# Altium PCB PCB2.PcbDoc
Units mil, origin at the board's own origin, x right, y up, seen from the top; angles counter-clockwise.
Board outline 1259.84 x 1615 mil, 2 copper layers (Top Layer, Bottom Layer); 51 components, 43 nets, 192 pads, 65 vias.
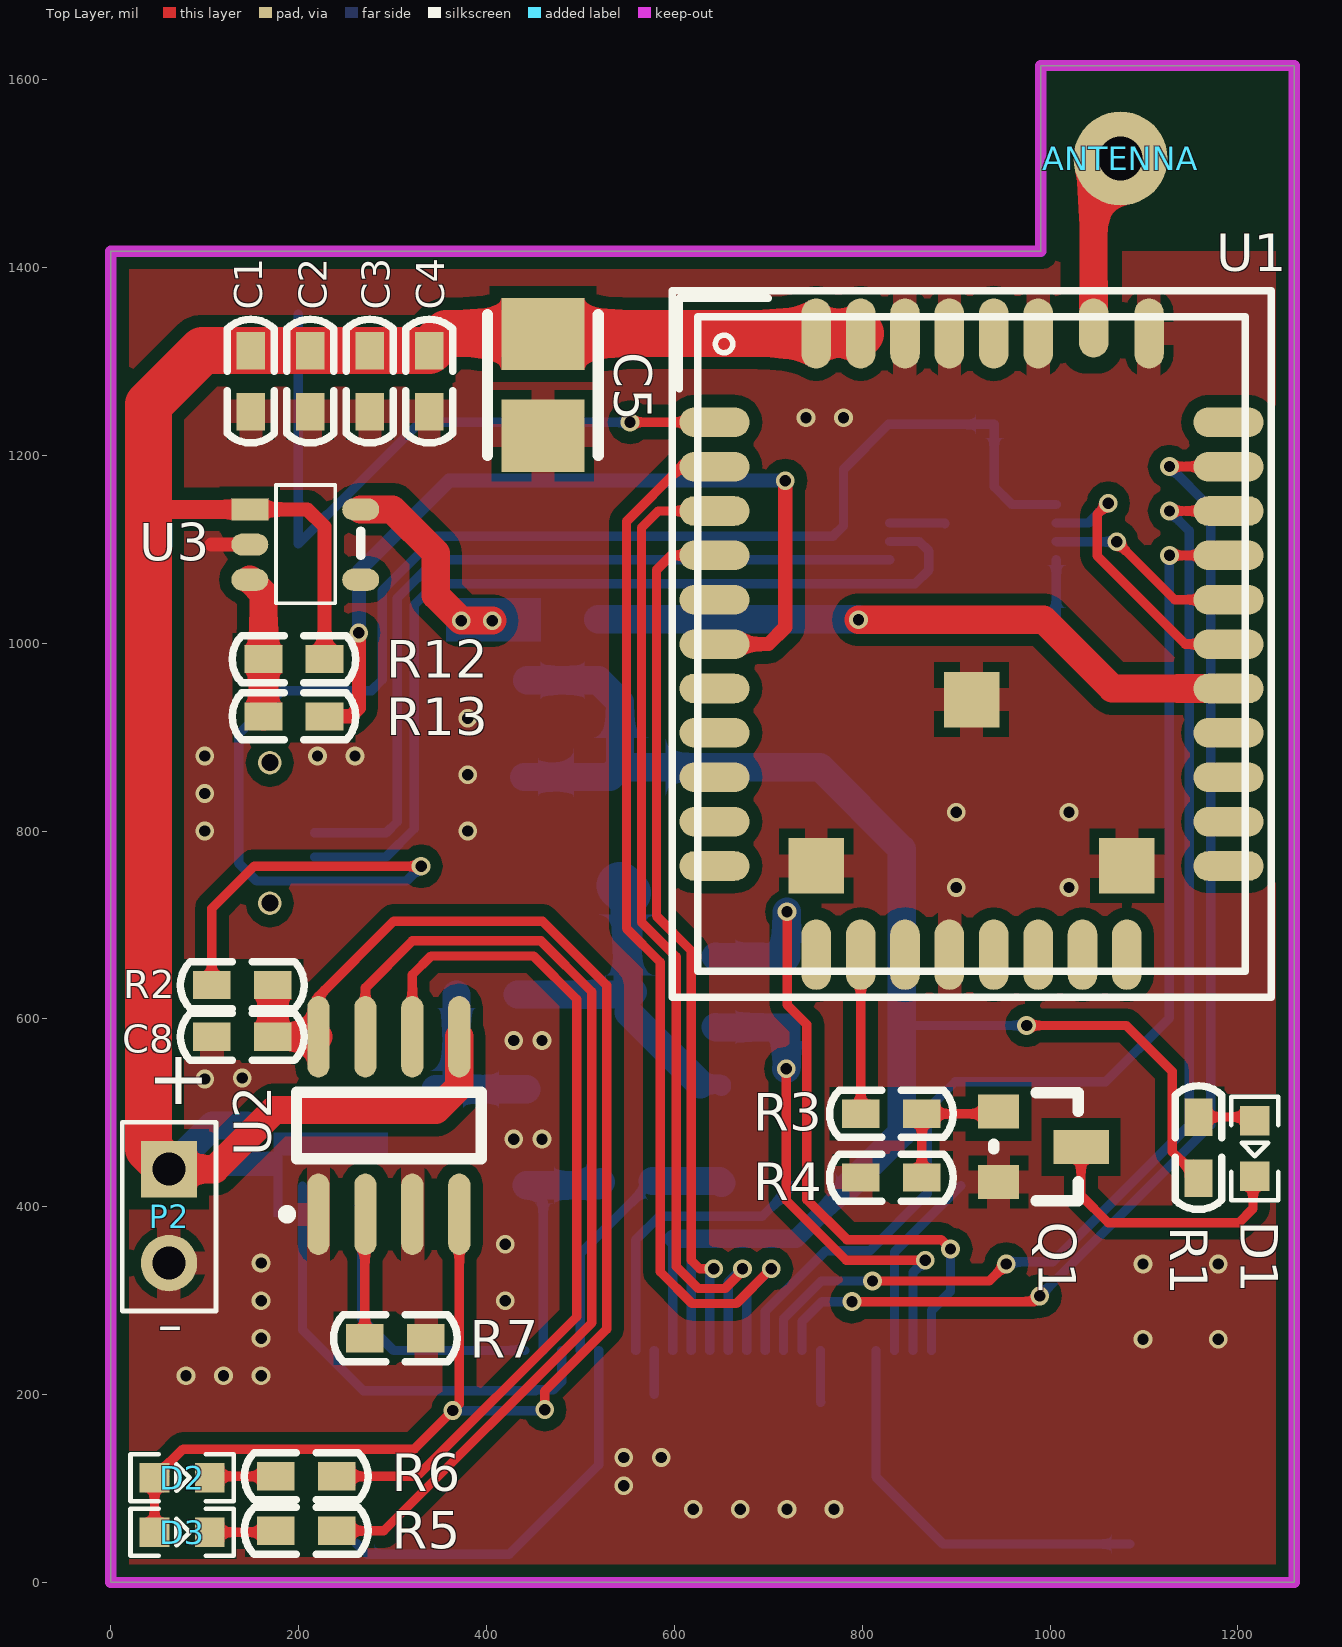
[diagram p0: Top Layer view]
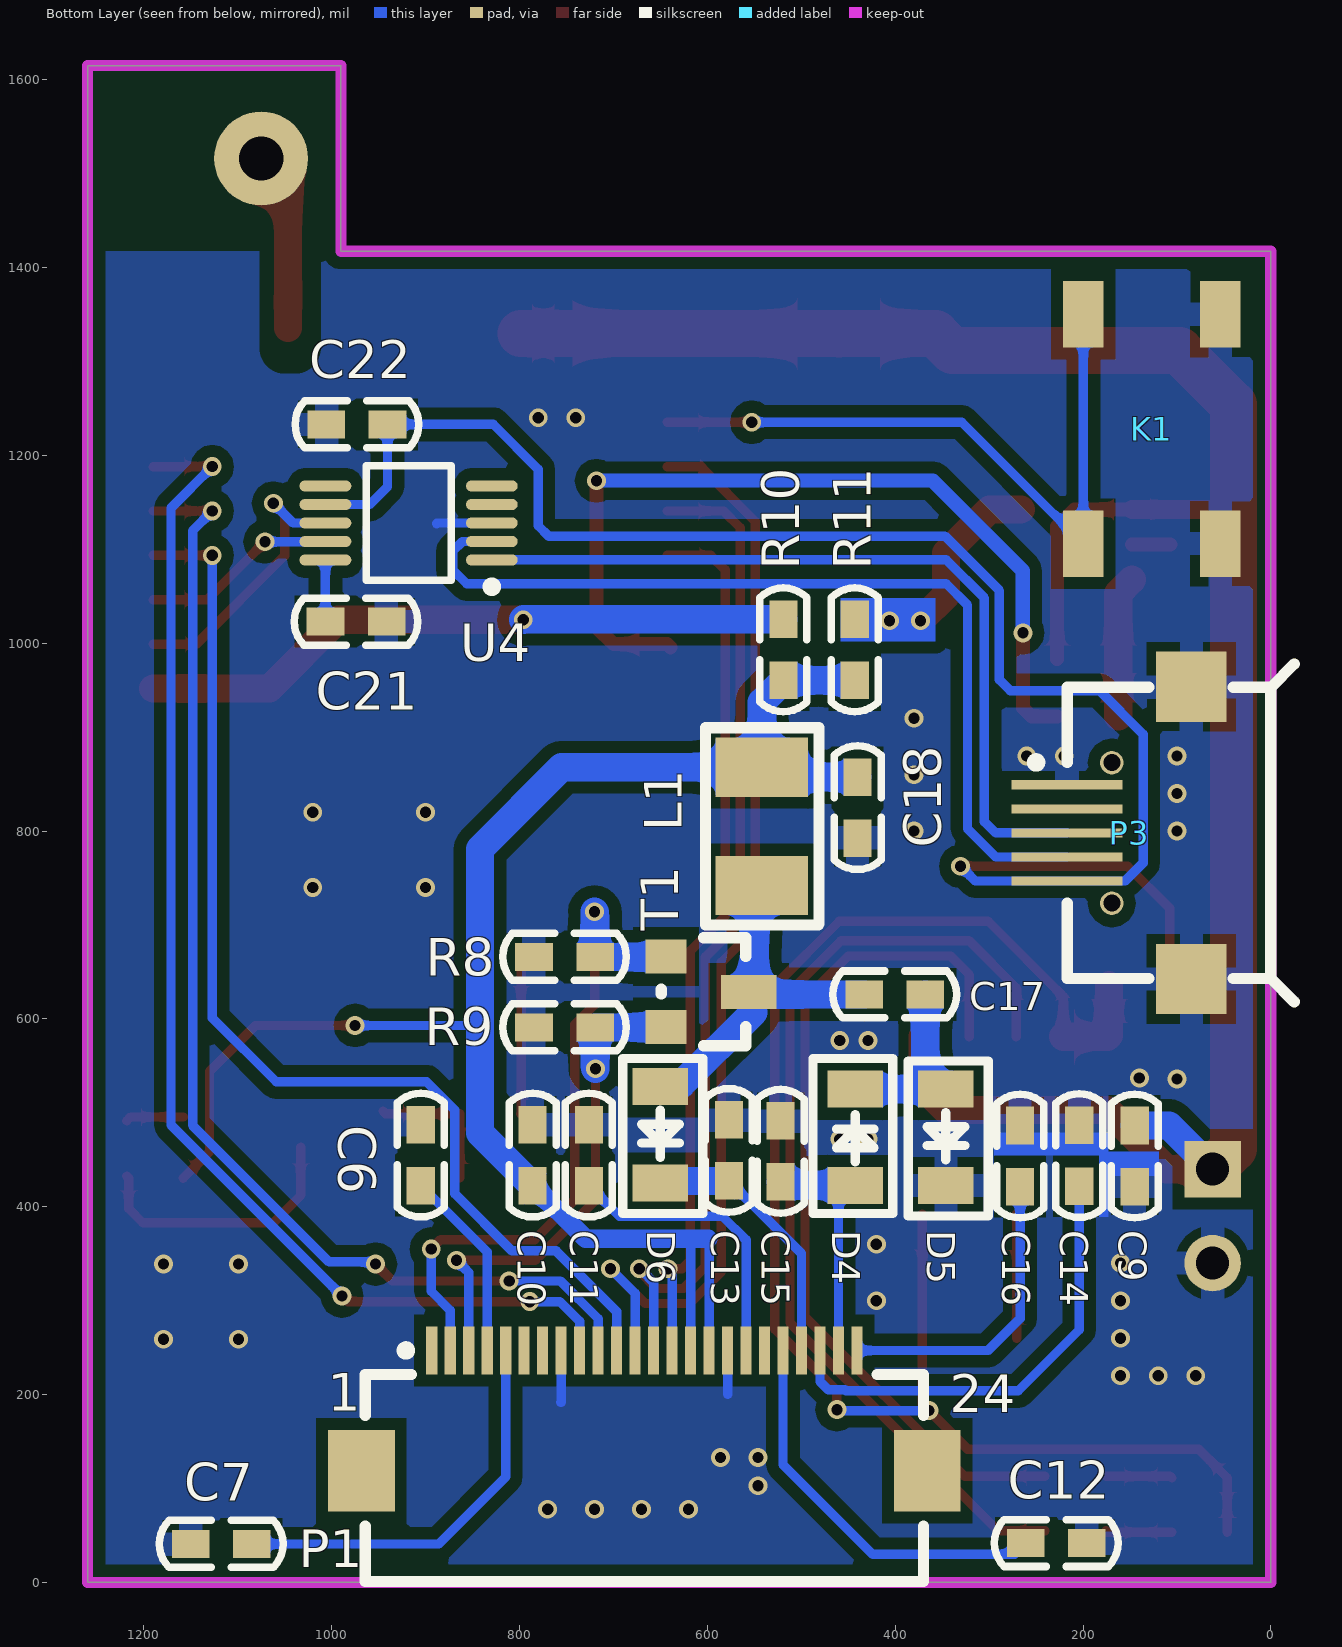
[diagram p1: Bottom Layer view, seen from below]
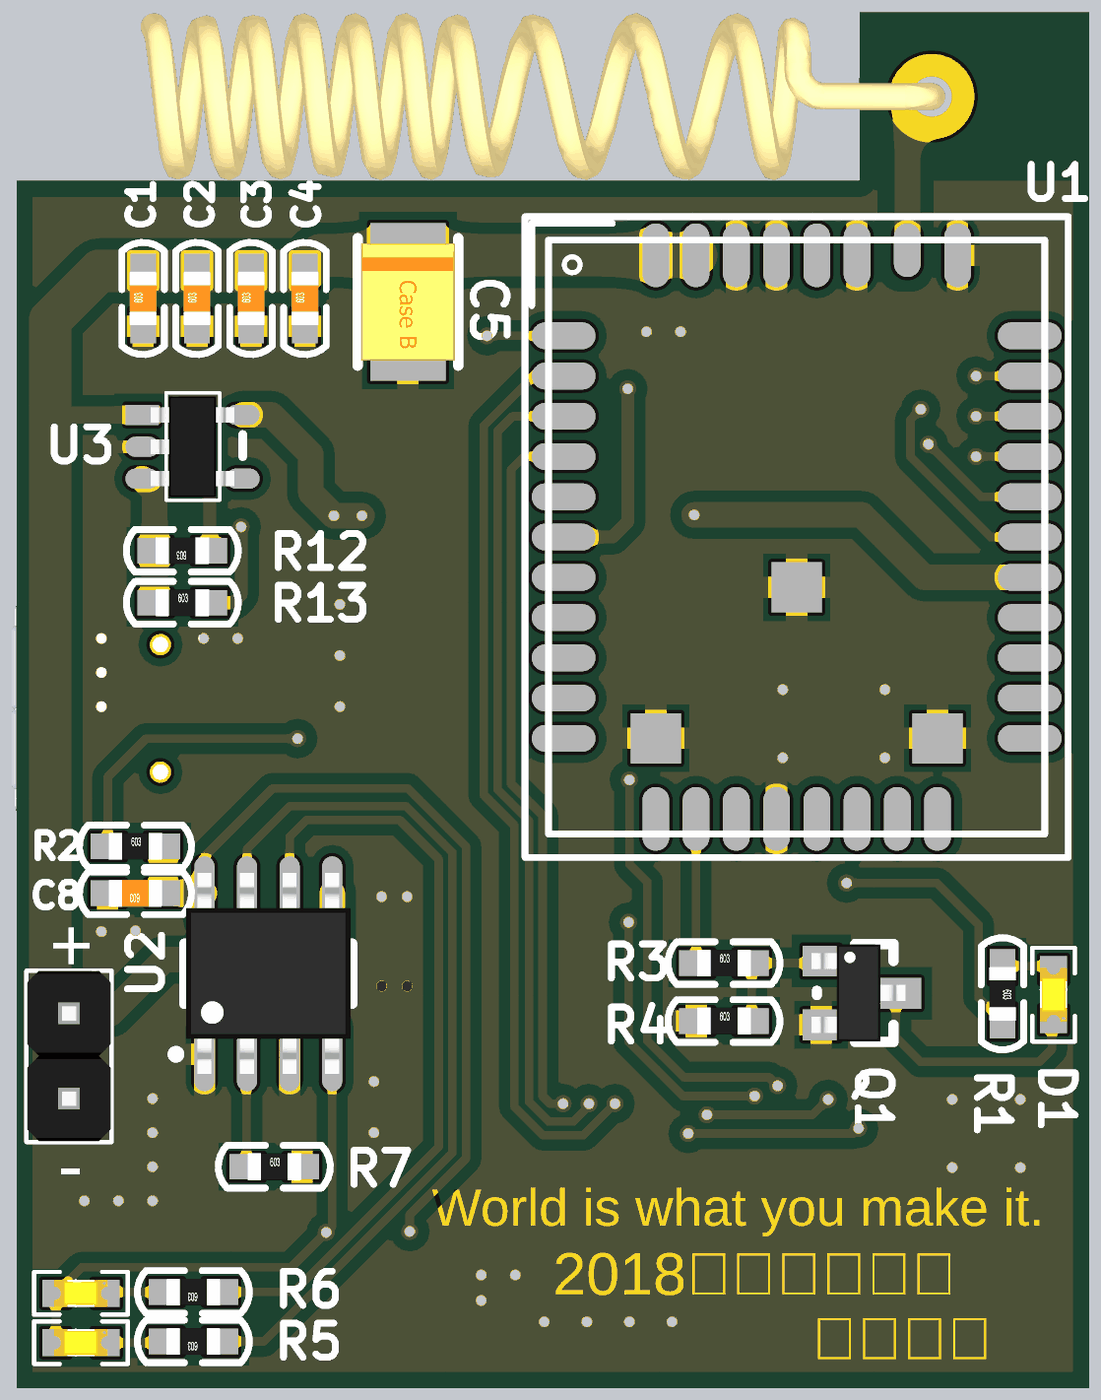
[diagram p2: 3D render of the assembled board from above, using the file's embedded part models]
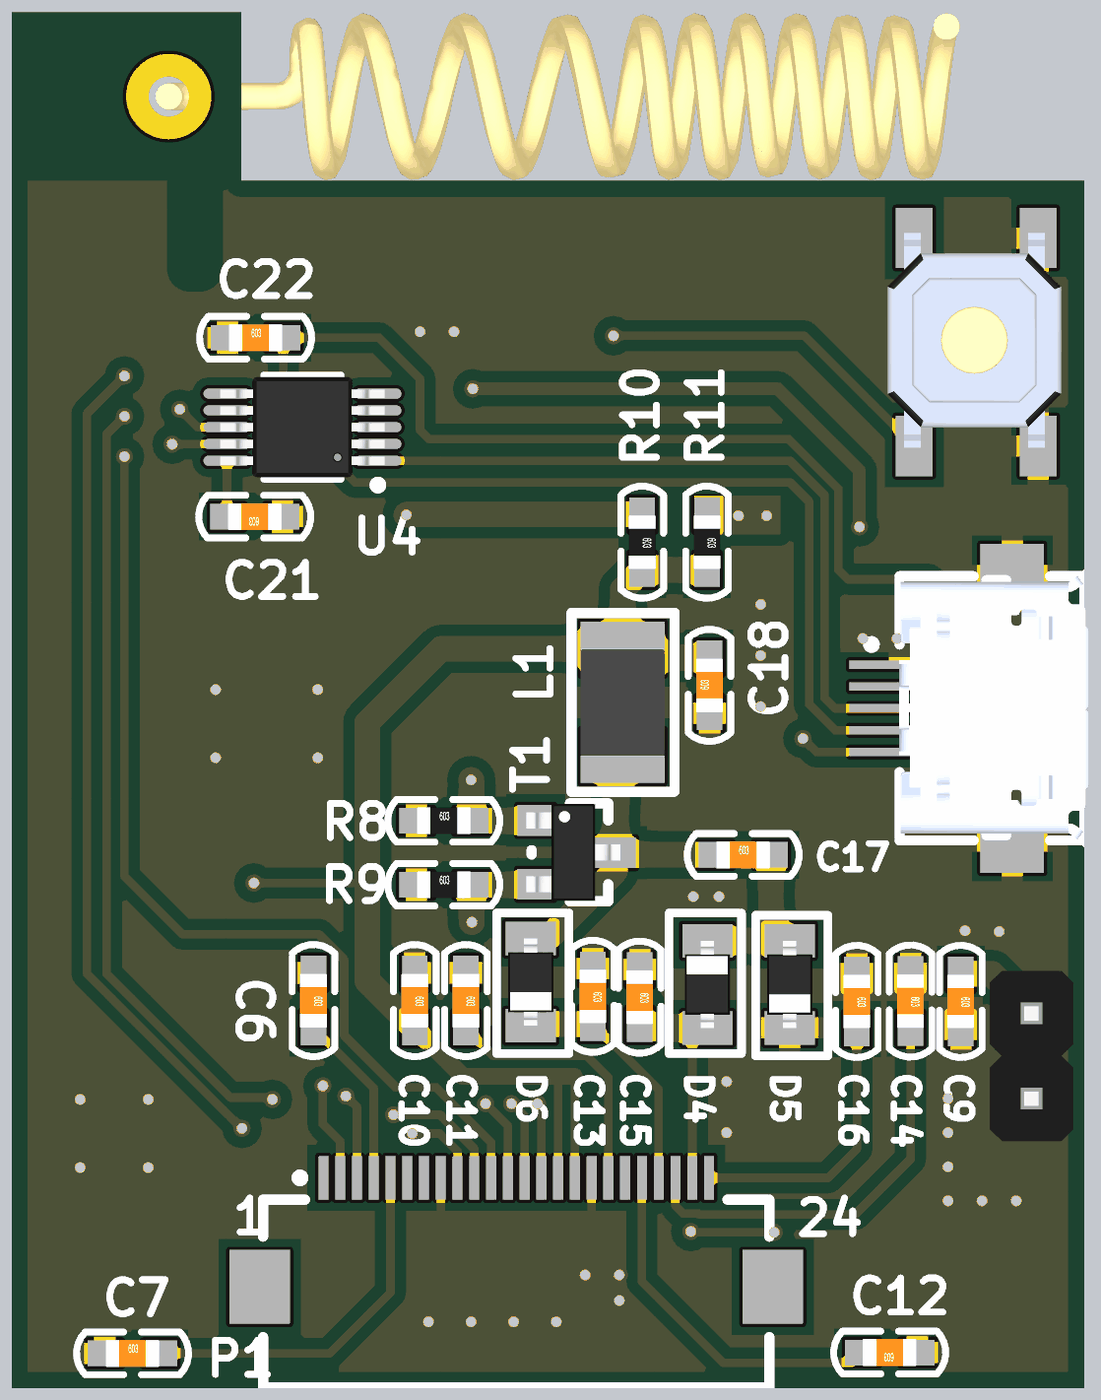
[diagram p3: 3D render of the assembled board from below, using the file's embedded part models]

## Layer stack, top to bottom
Top Solder: solder mask 0.4, Solder Resist, Dk 3.5
Top Layer: signal copper 1.4
Dielectric 1: dielectric 12.6, FR-4, Dk 4.8
Bottom Layer: signal copper 1.4
Bottom Solder: solder mask 0.4, Solder Resist, Dk 3.5

## Board outline
0,0 0,1417.32 990,1417.32 990,1615 1259.84,1615 1259.84,0

## Design rules (kind name [scope] priority, off if disabled: settings)
Clearance Clearance_1 [IsRegion] p1: gap=13
Clearance [All] p2: gap=6
MinimumSolderMaskSliver [All] p1: minsoldermaskwidth=0
PolygonConnect PolygonConnect_1 [IsVia] p1: connectstyle=Direct reliefconductorwidth=10 reliefentries=4 polygonreliefangle="90 Angle" airgapwidth=10
PolygonConnect [All] p2: connectstyle=Relief reliefconductorwidth=25 reliefentries=4 polygonreliefangle="90 Angle" airgapwidth=10
RoutingVias [All] p1: holewidth=28 width=50 viastyle="Through Hole" minholewidth=28 minwidth=50 maxholewidth=28 maxwidth=50
SilkToSilkClearance [All] p1: silktosilkclearance=0
SilkToSolderMaskClearance [IsPad] p1: minsilkscreentomaskgap=0 clearancetoexposedcopper=TRUE
SolderMaskExpansion [All] p1: expansion=4
Width [All] p1: maxlimit=50 minlimit=10 preferedwidth=30 minimp=50.000000 maximp=50.000000 favimp=50.000000
27 further rules are at their usual default settings.

## Components (designator, comment, footprint, x,y, rotation, side; value= is the part's Value field where it differs from the comment)
ANTENNA "ANTENNA" GSM/GPRS/3G弹簧天线 1075,1516 r180 top
C1 "18pF" 0603C-Cap 149,1279 r90 top
C2 "33pF" 0603C-Cap 212.33,1279 r90 top
C3 "0.1uF" 0603C-Cap 275.67,1279 r90 top
C4 "22uF" 0603C-Cap 339,1279 r90 top
C5 "Cap_C" CAPM-B-3528X21N 460,1275 r270 top
C6 "1uF" 0603C-Cap 905,455 r270 bottom
C7 "1uF" 0603C-Cap 1117.5,41 r180 bottom
C8 "10uF" 0603C-Cap 140,581 r180 top
C9 "10uF" 0603C-Cap 145,454 r270 bottom
C10 "0.1uF" 0603C-Cap 786,455 r270 bottom
C11 "1uF" 0603C-Cap 726,455 r270 bottom
C12 "1uF" 0603C-Cap 228.5,42 r0 bottom
C13 "1uF" 0603C-Cap 577,460 r270 bottom
C14 "1uF" 0603C-Cap 204,454.5 r270 bottom
C15 "1uF" 0603C-Cap 522,459 r270 bottom
C16 "1uF" 0603C-Cap 267,454 r270 bottom
C17 "4.7uF" 0603C-Cap 400.5,626 r180 bottom
C18 "4.7uF" 0603C-Cap 440,825 r90 bottom
C21 "0.1uF" 0603C-Cap 974,1023 r0 bottom
C22 "0.1uF" 0603C-Cap 973,1233 r180 bottom
D1 "LED" LED0603_B 1218,462 r270 top
D2 "LED" LED0603_B 76,111.5 r0 top
D3 "LED" LED0603_B 76,53.5 r0 top
D4 "Si1304BDL" SOD323 442.5,474 r90 bottom
D5 "Si1304BDL" SOD323 346,474 r270 bottom
D6 "Si1304BDL" SOD323 650,476.64 r270 bottom
K1 "SW_PB2" KEY_4*4 54,1350 r270 bottom
L1 "10uH" "3225 - duplicate" 542,805 r270 bottom
P1 "Header 24" FH12-24S-0.5SH 667,183 r180 bottom
P2 "Header 2" 2PIN 62,390 r270 top
P3 "USB-MINI" "Micro USB" 0,798 r90 bottom
Q1 "8050" SOT-23 989,464 r270 top
R1 "1K" 0603C-Res 1158,463 r270 top
R2 "0.4R" 0603C-Res 140,636 r0 top
R3 "1K" 0603C-Res 831,499 r0 top
R4 "10K" 0603C-Res 831,431 r0 top
R5 "1K" 0603C-Res 208,55 r180 top
R6 "1K" 0603C-Res 208,113 r180 top
R7 "1K" 0603C-Res 303,260 r0 top
R8 "10K" 0603C-Res 752,666 r180 bottom
R9 "3R" 0603C-Res 752,591 r180 bottom
R10 "NC" 0603C-Res 519,993 r270 bottom
R11 "0R" 0603C-Res 443,993 r270 bottom
R12 "NC" 0603C-Res 195,983 r180 top
R13 "NC" 0603C-Res 195,922 r0 top
T1 "Si1304BDL" SOT-23 600,629 r270 bottom
U1 "A6391_A11" 202 916.38,1001.98 r0 top
U2 "TP4056" SOP8LM386 221,392 r90 top
U3 "ME6211C33" SOT-23-5PIN 207,1105 r0 top
U4 "CH340E" TSSOP50P490X110-10N 918,1128 r0 bottom

## Footprints (in the part's own frame and the unit in brackets; to place one, negate y for a bottom-side part, rotate by r counter-clockwise, add the part's x,y. Pads: shape width x height; smd on the part's side, far side on the other; paste and mask are expansions set on the pad)
2PIN [mil]
  rect 60x60 hole 35: 1(-50,0)
  round 60 hole 35: 2(50,0)
  silkscreen extent -100,-50 101,50, body extent -100,-49 100,49, height 285
202 [mm]
  oval 1.9x0.8 smd: 1(-6.95,5.925) 2(-6.95,4.725) 3(-6.95,3.525) 4(-6.95,2.325) 5(-6.95,1.125) 6(-6.95,-0.075) 7(-6.95,-1.275) 8(-6.95,-2.475) 9(-6.95,-3.675) 10(-6.95,-4.875) 11(-6.95,-6.075) 20(6.95,-6.075) 21(6.95,-4.875) 22(6.95,-3.675) 23(6.95,-2.475) 24(6.95,-1.275) 25(6.95,-0.075) 26(6.95,1.125) 27(6.95,2.325) 28(6.95,3.525) 29(6.95,4.725) 30(6.95,5.925)
  oval 0.8x1.9 smd: 12(-4.2,-8.475) 13(-3,-8.475) 14(-1.8,-8.475) 15(-0.6,-8.475) 16(0.6,-8.475) 17(1.8,-8.475) 18(3,-8.475) 19(4.2,-8.475) 31(4.8,8.325) 33(1.8,8.325) 34(0.6,8.325) 35(-0.6,8.325) 36(-1.8,8.325) 37(-3,8.325) 38(-4.2,8.325)
  oval 0.8x1.6 smd: 32(3.3,8.475)
  rect 1.5x1.5 smd: 39(-4.2,-6.075) 40(4.2,-6.075) 41(0,-1.575)
  silkscreen extent -8.1,-9.62 8.1,9.48
0603C-Cap [mil]
  rect 40x30 smd: 1(-32.5,0) 2(32.5,0)
  silkscreen extent -66,-25 66,25, body extent -31,-16 32,16, height 12
0603C-Res [mil]
  rect 40x30 smd: 1(-32.5,0) 2(32.5,0)
  silkscreen extent -66,-25 66,25, body extent -31,-16 32,16, height 12
"3225 - duplicate" [mm]
  rect 1.6x2.5 smd: 1(-1.6,0) 2(1.6,0)
  silkscreen extent -2.67,-1.52 2.67,1.55, body extent -1.6,-1.25 1.6,1.25, height 2
CAPM-B-3528X21N [mm] "Molded Capacitor, 2-Leads, Body 3.50x2.80mm, IPC Medium Density"
  rect 1.95x2.25 smd: 1(-1.375,0) 2(1.375,0)
  silkscreen extent -1.9,-1.5 1.9,1.5, body extent -1.75,-1.4 1.75,1.4, height 1.9
FH12-24S-0.5SH [mm] "Connector; FH12 Series; 24 Position; 0.5mm Spaced Bottom Contact"
  rect 0.3x1.3 smd: 1(-5.75,1.625) 2(-5.25,1.625) 3(-4.75,1.625) 4(-4.25,1.625) 5(-3.75,1.625) 6(-3.25,1.625) 7(-2.75,1.625) 8(-2.25,1.625) 9(-1.75,1.625) 10(-1.25,1.625) 11(-0.75,1.625) 12(-0.25,1.625) 13(0.25,1.625) 14(0.75,1.625) 15(1.25,1.625) 16(1.75,1.625) 17(2.25,1.625) 18(2.75,1.625) 19(3.25,1.625) 20(3.75,1.625) 21(4.25,1.625) 22(4.75,1.625) 23(5.25,1.625) 24(5.75,1.625)
  rect 1.8x2.2 smd: 25(-7.65,-1.625) 26(7.65,-1.625)
  silkscreen extent -7.55,-4.62 7.55,1.75
GSM/GPRS/3G弹簧天线 [mm]
  round 2.54 hole 1.2: 1(0,0)
  body extent -0.4,-2.49 23.59,2.49, height 2.96
KEY_4*4 [mm]
  rect 1.8x1.1 smd: 1(0,0) 1(6.2,0) 2(0,-3.7) 2(6.2,-3.7)
  body extent -0.15,-4.5 6.25,0.7, height 1.5
LED0603_B [mm]
  rect 0.8x0.8 smd: A(-0.75,0) K(0.75,0)
  silkscreen extent -1.4,-0.64 1.4,0.64, body extent -0.8,-0.4 0.8,0.4, height 0.6
"Micro USB" [mm]
  rect 0.25x3 smd: 1(-1.3,5.508) 2(-0.65,5.508) 3(0,5.508) 4(0.65,5.508) 5(1.3,5.508)
  rect 1.9x1.9 smd: 6(-3.95,2.15) 7(3.95,2.15)
  round 0.635 hole 0.457 unplated: MH1(1.9,4.3) MH2(-1.9,4.3)
  silkscreen extent -4.57,-0.63 4.57,6.47, body extent -3.94,-0.14 3.98,5.52, height 3.09
SOD323 [mm]
  rect 1x1.5 smd: 1(-1.3,0) 2(1.3,0)
  silkscreen extent -2.06,-1.02 2.13,1.14, body extent -1.3,-0.67 1.3,0.68, height 1.1
SOP8LM386 [mm]
  oval 2.2x0.6 smd: 1(0,0) 2(0,-1.27) 3(0,-2.54) 4(0,-3.81) 5(4.8,-3.81) 6(4.8,-2.54) 7(4.8,-1.27) 8(4.8,0)
  silkscreen extent -0.12,-4.41 3.3,0.97, body extent -0.59,-4.36 5.41,0.55, height 1.75
SOT-23 [mil]
  rect 35.98x43.31 smd: 1(-37.5,-43.94) 2(37.5,-43.94)
  rect 36x59.06 smd: 3(0.5,43.94)
  silkscreen extent -58,-49 58,41, body extent -57,-55 57,55, height 51
SOT-23-5PIN [mm]
  rect 1x0.6 smd: 1(-1.5,0.95)
  oval 1x0.6 smd: 2(-1.5,0) 3(-1.5,-0.95) 4(1.5,-0.95) 5(1.5,0.95)
  silkscreen extent -0.79,-1.59 1.5,1.61, body extent -1.25,-1.5 1.25,1.5, height 1.08
TSSOP50P490X110-10N [mm] "TSSOP, 10-Leads, Body 3.00x3.00mm, Pitch 0.50mm, IPC Medium Density"
  oval 1.4x0.3 smd: 1(-2.25,1) 2(-2.25,0.5) 3(-2.25,0) 4(-2.25,-0.5) 5(-2.25,-1) 6(2.25,-1) 7(2.25,-0.5) 8(2.25,0) 9(2.25,0.5) 10(2.25,1)
  silkscreen extent -2.37,-1.55 1.15,1.85, body extent -2.45,-1.5 2.45,1.5, height 1.15

## Part data
C1 C2 C3 C4 C6 C7 C8 C9 C10 C11 C12 C13 C14 C15 C16 C17 C18 C21 C22: library part Cap, "ceramics"
C5: "Electrolytic"
D1 D2 D3: "发光二极管"
D4 D5 D6: library part "Diode BAS16"
L1: library part Inductor, "INDUCTOR"
P1: "Header, 7-Pin"
P3: "MINUSB"
Q1: library part NPN, "NPN"
R1 R2 R3 R4 R5 R6 R7 R8 R9 R10 R11 R12 R13: library part RES, "电阻"
T1: library part N_MOS
U1: "202оƬ"

## Via types
v1: diameter 20, hole 12, Top Layer to Bottom Layer, tented both sides, 65 vias

## Nets (pads, with @x,y where several pads share a name; then routed paths per layer and width w, separated by ;. In a path a pad name is that pad's centre, name@x,y a point inside that pad or via, vN(x,y) a via of type N, cw(c..) or ccw(c..) an arc to the next point about the centre after c; other vN are vias at no path point)
3.3V: C10.2 C18.2 L1.1 P1.15 P1.16 R1.2 R10.2 R11.2 | length 1879.2
  Top Layer w10: v1(975,593) 1081,593 1130,544 1130,458.5 R1.2
  Bottom Layer w10: P1.16 598.1,365.1 599,366 ; P1.15 617.79,360 ; 842,595 844,593 v1(975,593)
  Bottom Layer w20: 599,366 729.5,366 C10.2
  Bottom Layer w30: C18.2 531.51,857.5 L1.1 ; R11.2 R10.2 542,937.5 L1.1 ; C10.2 842,478.5 842,595 842,781 755.01,867.99 L1.1
BUSY: P1.9 U1.29 | length 1334.9
  Top Layer w10: v1(789,299) 983,299 v1(989,305) ; v1(1127,1188) U1.29
  Bottom Layer w10: P1.9 735.9,277.9 757,299 v1(789,299) ; v1(989,305) 1171,487 1171,1144 v1(1127,1188)
CS: P1.12 U1.2 | length 1176.9
  Top Layer w10: U1.2 607.37,1188 549,1129.63 549,696.37 585,660.37 585,330.75 618.75,297 666,297 v1(703,334)
  Bottom Layer w10: P1.12 676.84,307.84 v1(703,334)
D0: P1.13 U1.3 | length 1067.5
  Top Layer w10: U1.3 582.76,1140.76 565,1123 565,703 602,666 602,336.37 625.37,313 654,313 672.5,331.5 v1(672.5,334)
  Bottom Layer w10: P1.13 657.16,319.46 663,325.3 663,325.5 v1@669.5,332
D1: P1.14 U1.4 | length 933.1
  Top Layer w10: v1(642,334) 627,334 618,343 618,672.63 581,709.63 581,1078 596.51,1093.51 U1.4
  Bottom Layer w10: P1.14 637.47,327.47 v1@642,332
D/C: P1.11 U1.27 | length 1209.1
  Top Layer w10: v1(1127,1093.51) U1.27
  Bottom Layer w10: P1.11 696.53,288.53 761,353 808,353 869,414 869,503 899,533 1059,533 1127,601 v1(1127,1093.51)
GDR: P1.2 R8.2 T1.1 | length 730.3
  Top Layer w10: v1(720,714) 720,615 741,594 741,407.63 783.63,365 884,365 v1(894,355)
  Bottom Layer w10: P1.2 873.69,289.69 894,310 v1(894,355)
  Bottom Layer w30: T1.1 644.44,666 R8.2 719.5,713.5 v1(720,714)
GND: C1.1 C2.1 C3.1 C4.1 C5.2 C6.1 C7.1 C8.2 C9.2 C10.1 C11.1 C12.1 C13.1 C14.1 C15.1 C16.1 C18.1 C21.1 C22.1 D5.2 K1.1 P1.8 P1.17 P2.2 P3.5 P3.6 P3.7 Q1.2 R4.1 R7.2 R8.1 R9.1 U1.15 U1.31 U1.33 U1.35 U1.36 U1.39 U1.40 U1.41 U2.1 U2.3 U3.2 U4.3 | length 202.1
  Top Layer w15: 107,1105 U3.2
  Bottom Layer w10: 578.42,200.42 P1.17 ; P1.8 755.58,192 756,192 ; U4.3 887,1128 cw(c887,1127) 888,1127
  other v1: 620,78 670,78 720,78 770,78 546,103 546,133 586,133 80,220 120,220 160,220 1099,259 1179,259 160,260 160,300 420,300 1099,339 1179,339 160,340 420,360 429,472 459,472 100,536 140,537 429,577 459,577 900,740 1020,740 100,800 380,800 900,820 1020,820 100,840 380,860 100,880 220,880 260,880 380,920 740,1240 780,1240
GPIO_3: R13.2 U1.6 | length 923.6
  Top Layer w15: R13.2 255,922 264,931 v1(264,1011) ; U1.6@639.23,995.5 U1.6 700.02,999.02 718,1017 v1(718,1173)
  Bottom Layer w15: v1@264.12,1011 264.12,1077.12 360,1173 v1(718,1173)
HOST_RXD: U1.25 U4.8 | length 304
  Top Layer w10: v1(1062,1149) 1050,1137 1050,1093 1143.98,999.02 U1.25
  Bottom Layer w10: U4.8 1041,1128 v1(1062,1149)
HOST_TXD: U1.26 U4.9 | length 209.1
  Top Layer w10: v1(1071,1108) 1132.73,1046.27 U1.26
  Bottom Layer w10: U4.9 1006.9,1108 v1(1071,1108)
NET_LED: R3.1 U1.13 | length 169.4
  Top Layer w10: U1.13 798.27,499.23 R3.1
NetANTENNA_1: ANTENNA.1 U1.32 | length 192.3
  Top Layer w30: U1.32 1046.3,1487.3 ANTENNA.1
NetC6_2: C6.2 P1.4 | length 204.8
  Bottom Layer w10: P1.4 834.32,351.82 C6.2
NetC7_2: C7.2 P1.5 | length 434.5
  Bottom Layer w10: P1.5 814.64,112.36 886,41 C7.2
NetC8_1: C8.1 D2.A D3.A R2.2 U2.4 U2.8 | length 1708.6
  Top Layer w10: D3.A D2.A 76.97,142 323,142 v1(364,183) 371,190 U2.4 ; U2.8 221,624 301,704 459.63,704 528,635.63 528,269.75 462,203.75 v1(462,184)
  Top Layer w30: R2.2 172.5,582.45 173.98,580.98 U2.8
  Bottom Layer w10: v1(364,183) 461,183 v1(462,184)
NetC11_2: C11.2 P1.18 | length 309
  Bottom Layer w10: P1.18 558.73,364.73 584,390 693.5,390 C11.2
NetC12_2: C12.2 P1.20 | length 424.4
  Bottom Layer w10: C12.2 273,30 424,30 519.36,125.36 P1.20
NetC14_2: C14.2 P1.22 | length 493
  Bottom Layer w10: C14.2 204,269 269,204 452.3,204 453.3,205 471,205 479.99,213.99 P1.22
NetC16_2: C16.2 P1.24 | length 328.2
  Bottom Layer w10: C16.2 267,281 301.02,246.98 P1.24
NetC17_1: C17.1 D6.1 L1.2 T1.3 | length 396.9
  Bottom Layer w20: 551,607 551,623.44 553.56,626 T1.3 ; D6.1@627.5,530.5 650,530.5 D6.1
  Bottom Layer w30: C17.1 T1.3@553.56,626 ; L1.2@550,734.01 550,634.56 T1.3 ; 551,607 D6.1@627.5,530.5
  Bottom Layer w50: L1.2 L1.2@550,734.01
NetC17_2: C17.2 D4.2 D5.1 | length 192.5
  Bottom Layer w30: D5.1 D4.2 ; D5.1@368,530 C17.2
NetC21_2: C21.2 U4.10 | length 65.7
  Bottom Layer w10: C21.2 1006.58,1023.08 U4.10
NetD1_A: D1.A R1.1 | length 61.6
  Top Layer w10: R1.1 1214.03,495.5 D1.A
NetD1_K: D1.K Q1.3 | length 288.1
  Top Layer w10: Q1.3 1032.94,412.06 1062,383 1201,383 1216,398 1216,430.47 D1.K
NetD2_K: D2.K R6.2 | length 70.6
  Top Layer w10: D2.K 107.03,113 R6.2
NetD3_K: D3.K R5.2 | length 70.6
  Top Layer w10: D3.K 174,53.5 R5.2
NetK1_2: K1.2 U1.1 | length 740.8
  Top Layer w10: v1(552.76,1235.24) U1.1
  Bottom Layer w10: K1.2@199.67,1350 199.67,1105.91 329.01,1235.24 v1(552.76,1235.24)
NetP3_2: P3.2 U4.2 | length 986
  Bottom Layer w10: P3.2 292.87,772.41 323,802.54 323,1040.54 345.63,1063.17 856.17,1063.17 871,1078 871,1098 860.69,1108.31 U4.2
NetP3_3: P3.3 U4.1 | length 872.4
  Bottom Layer w10: P3.3 293,798 305,810 305,1048 345.63,1088.63 U4.1
NetQ1_1: Q1.1 R3.2 R4.2 | length 150.6
  Top Layer w10: R4.2 R3.2 942.56,499 Q1.1
NetR5_1: R5.1 U2.7 | length 1051.9
  Top Layer w10: R5.1 290.63,55 512,276.37 512,629 458,683 321,683 271,633 U2.7
NetR6_1: R6.1 U2.6 | length 932.3
  Top Layer w10: R6.1 326,113 496,283 496,621 450,667 341,667 321,647 U2.6
NetR7_1: R7.1 U2.2 | length 132.2
  Top Layer w10: R7.1 270.5,391.5 U2.2
NetR11_1: R11.1 U3.5 | length 215.3
  Top Layer w30: U3.5 299.6,1142.4 346,1096 346,1051 v1(373,1024) v1(406,1024)
NetR12_2: R12.2 R13.1 U3.3 | length 151.6
  Top Layer w30: U3.3 162.5,1053.04 R12.2 R13.1
PREVGH: C13.2 D6.2 P1.21 | length 286.4
  Bottom Layer w10: P1.21 499.68,350.18 C13.2
  Bottom Layer w30: C13.2 647.96,427.5 D6.2
PREVGL: C15.2 D4.1 P1.23 | length 264.2
  Bottom Layer w10: D4.1 460.31,405.01 P1.23
  Bottom Layer w30: D4.1 518.32,422.82 C15.2
RES: P1.10 U1.28 | length 1275.8
  Top Layer w10: v1(811,321) 935.25,321 v1(953.25,339) ; v1(1127,1140.76) U1.28
  Bottom Layer w10: P1.10 716.21,280.84 756.37,321 v1(811,321) ; v1@953.25,341.25 1002.62,341.25 1148,486.63 1148,1119.76 v1(1127,1140.76)
RESE: P1.3 R9.2 T1.2 | length 535.9
  Top Layer w10: v1(719,547) 719,407 783,343 v1(867,343)
  Bottom Layer w10: P1.3 854.01,330.01 v1(867,343)
  Bottom Layer w30: T1.2 644.44,591 R9.2 719.5,547.5 v1(719,547)
VCC: C1.2 C2.2 C3.2 C4.2 C5.1 C9.1 P2.1 R12.1 U1.37 U1.38 U2.5 U3.1 | length 2450.6
  Top Layer w15: U3.1 209.16,1142.4 227.5,1124.06 R12.1
  Top Layer w20: 40,1142 40.4,1142.4 U3.1
  Top Layer w30: P2.1 111,440 174,503 346,503 371,528 U2.5
  Top Layer w50: P2.1 40,462 40,1142 40,1254 97.5,1311.5 C1.2 C2.2 C3.2 C4.2 357.23,1329.73 C5.1@460.6,1329.73 ; C5.1 C5.1@460.6,1329.73 ; U1.37 U1.38 C5.1@460.6,1329.73
  Bottom Layer w30: P2.1 108.5,486.5 C9.1
VCC_5V: C22.2 P3.1 R2.1 U4.7 | length 1841.2
  Top Layer w10: R2.1 107.5,717.5 152.5,762.5 v1(330.37,762.5)
  Bottom Layer w10: v1(330.37,762.5) 314.68,746.82 P3.1 155.18,746.82 136,766 136,903 182.5,949.5 277.5,949.5 289,961 289,1056 347,1114 769,1114 780,1125 780,1185 828,1233 C22.2 940.5,1166.5 959.31,1147.68 U4.7
VDDIO: R10.1 U1.24 | length 701.5
  Top Layer w30: v1(796,1025) 993,1025 1066.22,951.78 U1.24
  Bottom Layer w30: R10.1 795.5,1025.5 v1(796,1025)
pads on no net: P1.1 P1.6 P1.7 P1.19 P1.25 P1.26 P3.4 P3.MH1 P3.MH2 U1.5 U1.7 U1.8 U1.9 U1.10 U1.11 U1.12 U1.14 U1.16 U1.17 U1.18 U1.19 U1.20 U1.21 U1.22 U1.23 U1.30 U1.34 U3.4 U4.4 U4.5 U4.6

## Polygon pours and split planes (outlines as drawn)
GND on Top Layer "Bottom Layer-No Net" (solid, remove dead copper, pour order 8): 0,0 0,1417.32 1259.84,1417.32 1259.84,0
GND on Bottom Layer "Bottom Layer-No Net" (solid, remove dead copper, pour order 10): 0,0 0,1417.32 1259.84,1417.32 1259.84,0

## Keep-outs
Keep-Out Layer:
  the board outline again, w12

## Other copper
Top Layer:
  pour cut-out: 1011,1418 1011,1315 ccw(c1039,1315) 1039,1287 1050,1287 ccw(c1050,1314) 1077,1314 1077,1418
Bottom Layer:
  rectangle net GND: 173,454.5 295,479
  rectangle net GND: 173,389 183,479
  rectangle net GND: 119,433 183,459
  rectangle net NetR11_1: 357,1002 458,1048
  pour cut-out: 1011,1418 1011,1315 ccw(c1039,1315) 1039,1287 1050,1287 ccw(c1050,1314) 1077,1314 1077,1418

## Silkscreen, mask and mechanical layers (free items; w line width, h text height)
Top Overlay:
  text "+" at 39,490 h100
  text "-" at 49,231 h100
Top Solder:
  text "World is what you make it." at 488,191 h70
  text "2018届科技创新室" at 630,109.84 h80
  text "毕业纪念" at 934.44,34 h80

## Text inside footprints (layer, text, board x,y; h text height)
P1: Bottom Overlay "24" at 342,181 h40; Bottom Overlay "1" at 1004,183 h40